# EAGLE board WS2801-Breakout-v11-panelized (EAGLE 5.11)
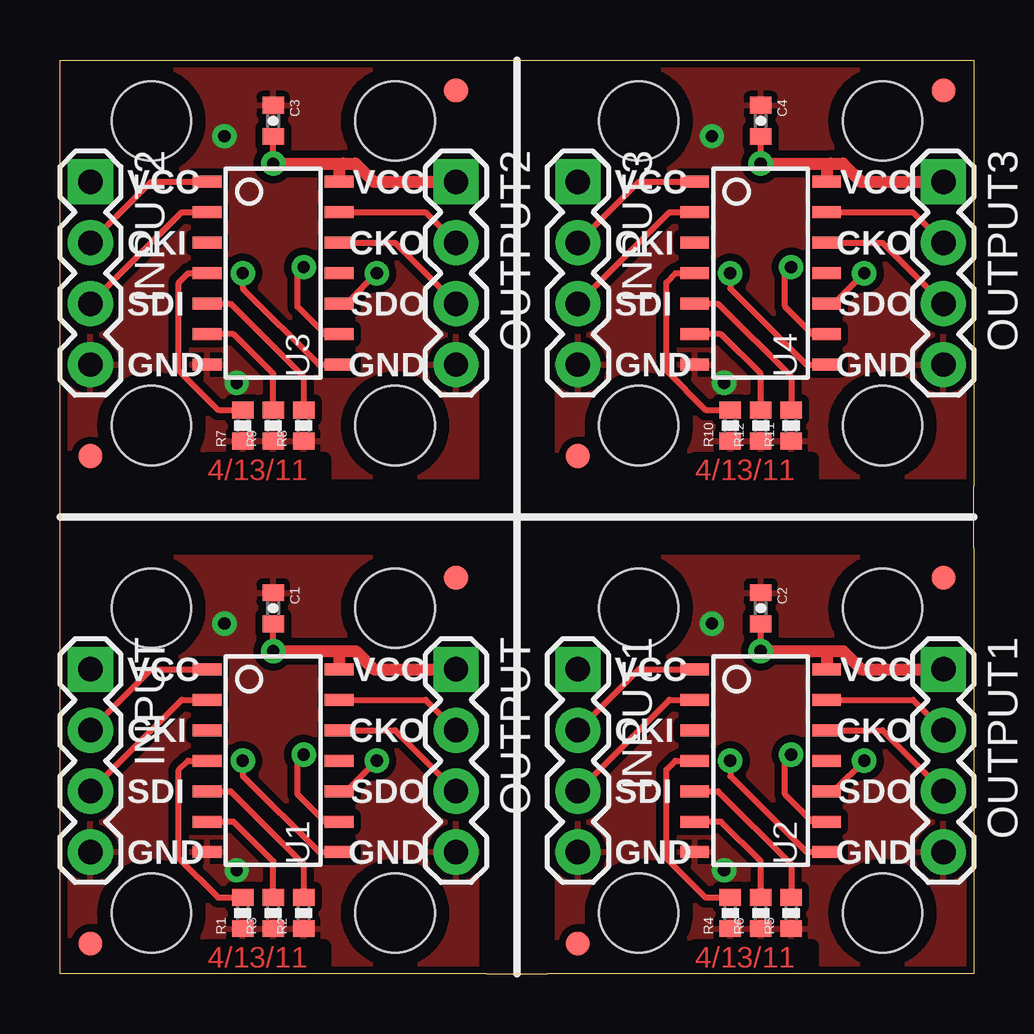
[diagram p0: board, top side]
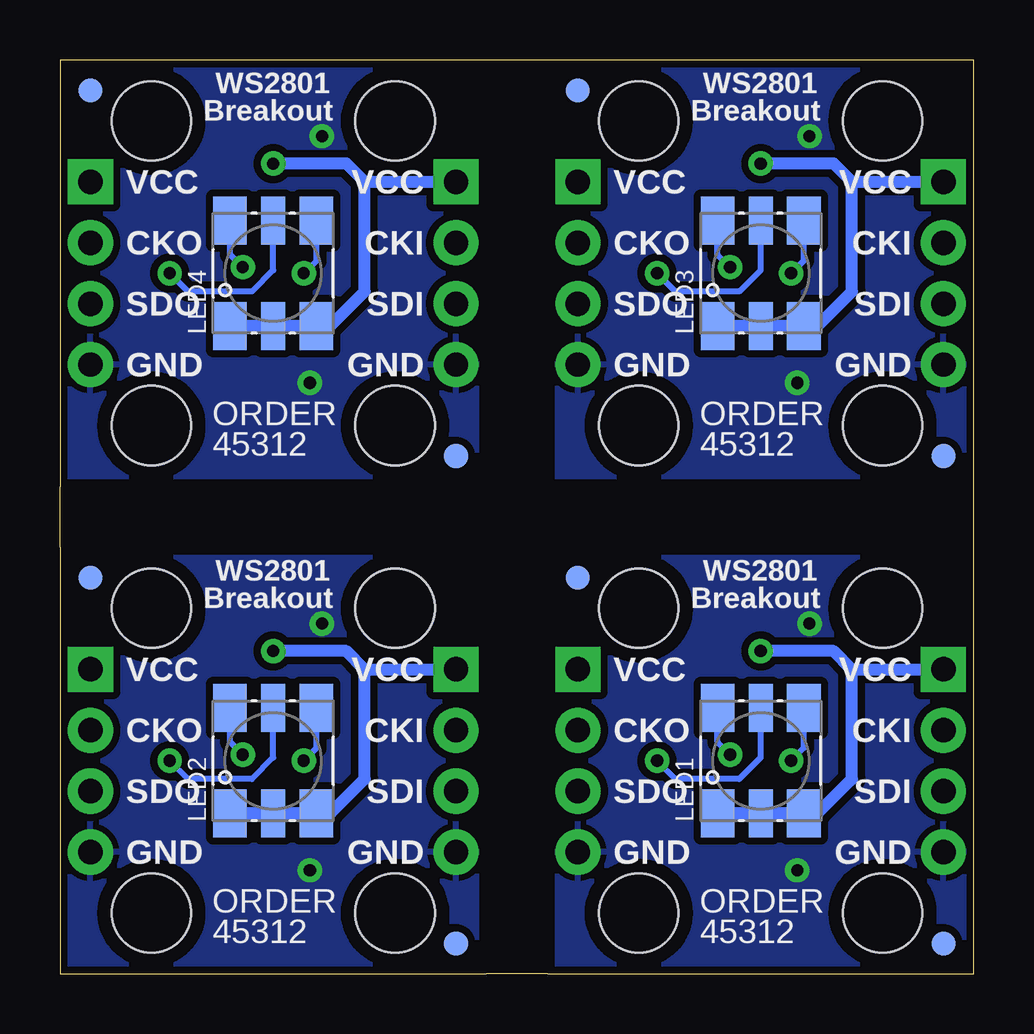
[diagram p1: board, bottom side, seen from below]

Size 38.1 x 38.1 mm. Coordinates in mm from the lower left corner, seen from the top.
Outline: 0,0 0,17.78 0,19.05 0,20.32 0,38.1 17.78,38.1 19.05,38.1 20.32,38.1 38.1,38.1 38.1,20.32 38.1,19.05 38.1,17.78 38.1,0 20.32,0 19.05,0 17.78,0 0,0
Copper layers (1*16): Top 0.035mm / dielectric 1.5mm / Bottom 0.035mm
Design rules "SparkFun *": minimum track width 8mil, minimum drill 20mil, track to track 8mil, track to pad 8mil, pad to pad 8mil, via to via 8mil, smd to smd 8mil, copper to edge 8mil, drill to drill 8mil, minimum pad ring 12mil, minimum via ring 10mil, stop-mask expansion 4mil, vias tented up to drill 20mil, thermal gap 10mil
tRestrict: 8 lines
bRestrict: 8 lines

## Footprints (pad centres in the part's own frame; a part is rotated, then mirrored left to right if it is on the bottom)
0402-CAP = smd 0.7 x 0.9: 1 -0.65,0; 2 0.65,0
1X04 = drill 1.016 pad 1.88 square: 1 0,0 | drill 1.016 pad 1.88 round: 2 2.54,0; 3 5.08,0; 4 7.62,0
STAND-OFF = hole 3.302: 0,0
FIDUCIAL-1X2 = smd 1 x 1: 1 0,0
LED-TRICOLOR-5050 = smd 2 x 1.4: 1 -2.2,1.8; 3 -2.2,-1.8; 4 2.2,-1.8; 6 2.2,1.8 | smd 2 x 1: 2 -2.2,0; 5 2.2,0
0402-RES = smd 0.7 x 0.9: 1 -0.65,0; 2 0.65,0
SOP-14 = smd 0.5 x 1.2: 1 -3.81,-2.75; 2 -2.54,-2.75; 3 -1.27,-2.75; 4 0,-2.75; 5 1.27,-2.75; 6 2.54,-2.75; 7 3.81,-2.75; 8 3.81,2.75; 9 2.54,2.75; 10 1.27,2.75; 11 0,2.75; 12 -1.27,2.75; 13 -2.54,2.75; 14 -3.81,2.75

## Placement (x,y rotation side)
C1  0.1uF  [0402-CAP]  8.89,15.24 270 top
C2  0.1uF  [0402-CAP]  29.21,15.24 270 top
C3  0.1uF  [0402-CAP]  8.89,35.56 270 top
C4  0.1uF  [0402-CAP]  29.21,35.56 270 top
INPUT  [1X04]  1.27,12.7 270 top
INPUT1  [1X04]  21.59,12.7 270 top
INPUT2  [1X04]  1.27,33.02 270 top
INPUT3  [1X04]  21.59,33.02 270 top
JP1  STAND-OFF  [STAND-OFF]  13.97,15.24 0 top
JP2  STAND-OFF  [STAND-OFF]  3.81,2.54 0 top
JP3  STAND-OFF  [STAND-OFF]  34.29,15.24 0 top
JP4  STAND-OFF  [STAND-OFF]  3.81,15.24 0 top
JP5  STAND-OFF  [STAND-OFF]  13.97,2.54 0 top
JP6  FIDUCIAL1X2  [FIDUCIAL-1X2]  16.51,16.51 0 top
JP7  FIDUCIAL1X2  [FIDUCIAL-1X2]  1.27,1.27 0 top
JP8  FIDUCIAL1X2  [FIDUCIAL-1X2]  1.27,1.27 0 bottom
JP9  FIDUCIAL1X2  [FIDUCIAL-1X2]  16.51,16.51 0 bottom
JP10  STAND-OFF  [STAND-OFF]  24.13,2.54 0 top
JP11  STAND-OFF  [STAND-OFF]  24.13,15.24 0 top
JP12  STAND-OFF  [STAND-OFF]  34.29,2.54 0 top
JP13  FIDUCIAL1X2  [FIDUCIAL-1X2]  36.83,16.51 0 top
JP14  FIDUCIAL1X2  [FIDUCIAL-1X2]  21.59,1.27 0 top
JP15  FIDUCIAL1X2  [FIDUCIAL-1X2]  21.59,1.27 0 bottom
JP16  FIDUCIAL1X2  [FIDUCIAL-1X2]  36.83,16.51 0 bottom
JP17  STAND-OFF  [STAND-OFF]  13.97,35.56 0 top
JP18  STAND-OFF  [STAND-OFF]  3.81,22.86 0 top
JP19  STAND-OFF  [STAND-OFF]  3.81,35.56 0 top
JP20  STAND-OFF  [STAND-OFF]  13.97,22.86 0 top
JP21  FIDUCIAL1X2  [FIDUCIAL-1X2]  16.51,36.83 0 top
JP22  FIDUCIAL1X2  [FIDUCIAL-1X2]  1.27,21.59 0 top
JP23  FIDUCIAL1X2  [FIDUCIAL-1X2]  1.27,21.59 0 bottom
JP24  FIDUCIAL1X2  [FIDUCIAL-1X2]  16.51,36.83 0 bottom
JP25  STAND-OFF  [STAND-OFF]  34.29,35.56 0 top
JP26  STAND-OFF  [STAND-OFF]  24.13,22.86 0 top
JP27  STAND-OFF  [STAND-OFF]  24.13,35.56 0 top
JP28  STAND-OFF  [STAND-OFF]  34.29,22.86 0 top
JP29  FIDUCIAL1X2  [FIDUCIAL-1X2]  36.83,36.83 0 top
JP30  FIDUCIAL1X2  [FIDUCIAL-1X2]  21.59,21.59 0 top
JP31  FIDUCIAL1X2  [FIDUCIAL-1X2]  21.59,21.59 0 bottom
JP32  FIDUCIAL1X2  [FIDUCIAL-1X2]  36.83,36.83 0 bottom
LED1  LED-TRICOLOR-5050  [LED-TRICOLOR-5050]  8.89,8.89 90 bottom
LED2  LED-TRICOLOR-5050  [LED-TRICOLOR-5050]  29.21,8.89 90 bottom
LED3  LED-TRICOLOR-5050  [LED-TRICOLOR-5050]  8.89,29.21 90 bottom
LED4  LED-TRICOLOR-5050  [LED-TRICOLOR-5050]  29.21,29.21 90 bottom
OUTPUT  [1X04]  16.51,12.7 270 top
OUTPUT1  [1X04]  36.83,12.7 270 top
OUTPUT2  [1X04]  16.51,33.02 270 top
OUTPUT3  [1X04]  36.83,33.02 270 top
R1  27  [0402-RES]  7.62,2.54 90 top
R2  27  [0402-RES]  10.16,2.54 90 top
R3  27  [0402-RES]  8.89,2.54 90 top
R4  27  [0402-RES]  27.94,2.54 90 top
R5  27  [0402-RES]  30.48,2.54 90 top
R6  27  [0402-RES]  29.21,2.54 90 top
R7  27  [0402-RES]  7.62,22.86 90 top
R8  27  [0402-RES]  10.16,22.86 90 top
R9  27  [0402-RES]  8.89,22.86 90 top
R10  27  [0402-RES]  27.94,22.86 90 top
R11  27  [0402-RES]  30.48,22.86 90 top
R12  27  [0402-RES]  29.21,22.86 90 top
U1  WS2801  [SOP-14]  8.89,8.89 270 top
U2  WS2801  [SOP-14]  29.21,8.89 270 top
U3  WS2801  [SOP-14]  8.89,29.21 270 top
U4  WS2801  [SOP-14]  29.21,29.21 270 top
U$1  CREATIVE_COMMONS  [CREATIVE_COMMONS]  -13.97,-8.89 0 top  (outside the outline)

## Library data of the parts
C1-C4 INPUT INPUT1-INPUT3 JP1-JP32 LED1-LED4 OUTPUT OUTPUT1-OUTPUT3 R1-R12 U1-U4 U$1 = SparkFun

## Nets
BFB: R3.2 U1.6
BFB1: R6.2 U2.6
BFB2: R9.2 U3.6
BFB3: R12.2 U4.6
BOUT: LED1.4 U1.8
BOUT1: LED2.4 U2.8
BOUT2: LED3.4 U3.8
BOUT3: LED4.4 U4.8
CKI: INPUT.2 U1.1
CKI1: INPUT1.2 U2.1
CKI2: INPUT2.2 U3.1
CKI3: INPUT3.2 U4.1
CKO: OUTPUT.2 U1.13
CKO1: OUTPUT1.2 U2.13
CKO2: OUTPUT2.2 U3.13
CKO3: OUTPUT3.2 U4.13
GFB: R2.2 U1.5
GFB1: R5.2 U2.5
GFB2: R8.2 U3.5
GFB3: R11.2 U4.5
GND: C1.1 INPUT.4 OUTPUT.4 R1.1 R2.1 R3.1 U1.7
GND1: C2.1 INPUT1.4 OUTPUT1.4 R4.1 R5.1 R6.1 U2.7
GND2: C3.1 INPUT2.4 OUTPUT2.4 R7.1 R8.1 R9.1 U3.7
GND3: C4.1 INPUT3.4 OUTPUT3.4 R10.1 R11.1 R12.1 U4.7
GOUT: LED1.6 U1.9
GOUT1: LED2.6 U2.9
GOUT2: LED3.6 U3.9
GOUT3: LED4.6 U4.9
RFB: R1.2 U1.4
RFB1: R4.2 U2.4
RFB2: R7.2 U3.4
RFB3: R10.2 U4.4
ROUT: LED1.5 U1.10
ROUT1: LED2.5 U2.10
ROUT2: LED3.5 U3.10
ROUT3: LED4.5 U4.10
SDI: INPUT.3 U1.2
SDI1: INPUT1.3 U2.2
SDI2: INPUT2.3 U3.2
SDI3: INPUT3.3 U4.2
SDO: OUTPUT.3 U1.12
SDO1: OUTPUT1.3 U2.12
SDO2: OUTPUT2.3 U3.12
SDO3: OUTPUT3.3 U4.12
VCC: C1.2 INPUT.1 LED1.1 LED1.2 LED1.3 OUTPUT.1 U1.14
VCC1: C2.2 INPUT1.1 LED2.1 LED2.2 LED2.3 OUTPUT1.1 U2.14
VCC2: C3.2 INPUT2.1 LED3.1 LED3.2 LED3.3 OUTPUT2.1 U3.14
VCC3: C4.2 INPUT3.1 LED4.1 LED4.2 LED4.3 OUTPUT3.1 U4.14

## Tracks (layer width: path | path; a pad name or v marks a point on that pad's centre or on a via)
BFB
  Top 0.254: R3.2 8.89,4.7 7.24,6.35 U1.6
BFB1
  Top 0.254: R6.2 29.21,4.7 27.56,6.35 U2.6
BFB2
  Top 0.254: R9.2 8.89,25.02 7.24,26.67 U3.6
BFB3
  Top 0.254: R12.2 29.21,25.02 27.56,26.67 U4.6
BOUT  (via drill 0.51)
  Top 0.254: U1.8 10.79,5.08 7.62,8.26 v7.62,8.89
  Bottom 0.254: LED1.4 7.09,9.42 v7.62,8.89
BOUT1  (via drill 0.51)
  Top 0.254: U2.8 31.11,5.08 27.94,8.26 v27.94,8.89
  Bottom 0.254: LED2.4 27.41,9.42 v27.94,8.89
BOUT2  (via drill 0.51)
  Top 0.254: U3.8 10.79,25.4 7.62,28.57 v7.62,29.21
  Bottom 0.254: LED3.4 7.09,29.74 v7.62,29.21
BOUT3  (via drill 0.51)
  Top 0.254: U4.8 31.11,25.4 27.94,28.57 v27.94,29.21
  Bottom 0.254: LED4.4 27.41,29.74 v27.94,29.21
CKI
  Top 0.254: U1.1 3.81,12.7 INPUT.2
CKI1
  Top 0.254: U2.1 24.13,12.7 INPUT1.2
CKI2
  Top 0.254: U3.1 3.81,33.02 INPUT2.2
CKI3
  Top 0.254: U4.1 24.13,33.02 INPUT3.2
CKO
  Top 0.254: U1.13 15.24,11.43 OUTPUT.2
CKO1
  Top 0.254: U2.13 35.56,11.43 OUTPUT1.2
CKO2
  Top 0.254: U3.13 15.24,31.75 OUTPUT2.2
CKO3
  Top 0.254: U4.13 35.56,31.75 OUTPUT3.2
GFB
  Top 0.254: U1.5 7.11,7.62 10.16,4.57 R2.2
GFB1
  Top 0.254: U2.5 27.43,7.62 30.48,4.57 R5.2
GFB2
  Top 0.254: U3.5 7.11,27.94 10.16,24.89 R8.2
GFB3
  Top 0.254: U4.5 27.43,27.94 30.48,24.89 R11.2
GND  (via drill 0.51)
  other vias: 6.86,14.61 7.37,4.32
  pour Top (isolate 0.305): 0,17.78 0,0 17.78,0 17.78,17.78
  pour Bottom (isolate 0.305): 0,17.78 0,0 17.78,0 17.78,17.78
GND1  (via drill 0.51)
  other vias: 27.18,14.61 27.69,4.32
  pour Top (isolate 0.305): 20.32,17.78 20.32,0 38.1,0 38.1,17.78
  pour Bottom (isolate 0.305): 20.32,17.78 20.32,0 38.1,0 38.1,17.78
GND2  (via drill 0.51)
  other vias: 6.86,34.92 7.37,24.64
  pour Top (isolate 0.305): 0,38.1 0,20.32 17.78,20.32 17.78,38.1
  pour Bottom (isolate 0.305): 0,38.1 0,20.32 17.78,20.32 17.78,38.1
GND3  (via drill 0.51)
  other vias: 27.18,34.92 27.69,24.64
  pour Top (isolate 0.305): 20.32,38.1 20.32,20.32 38.1,20.32 38.1,38.1
  pour Bottom (isolate 0.305): 20.32,38.1 20.32,20.32 38.1,20.32 38.1,38.1
GOUT  (via drill 0.51)
  Top 0.254: U1.9 11.05,6.35 9.91,7.49 9.91,8.89 v10.16,9.14
  Bottom 0.254: LED1.6 10.69,9.67 v10.16,9.14
GOUT1  (via drill 0.51)
  Top 0.254: U2.9 31.37,6.35 30.23,7.49 30.23,8.89 v30.48,9.14
  Bottom 0.254: LED2.6 31.01,9.67 v30.48,9.14
GOUT2  (via drill 0.51)
  Top 0.254: U3.9 11.05,26.67 9.91,27.81 9.91,29.21 v10.16,29.46
  Bottom 0.254: LED3.6 10.69,29.99 v10.16,29.46
GOUT3  (via drill 0.51)
  Top 0.254: U4.9 31.37,26.67 30.23,27.81 30.23,29.21 v30.48,29.46
  Bottom 0.254: LED4.6 31.01,29.99 v30.48,29.46
RFB
  Top 0.254: U1.4 5.33,8.89 4.95,8.51 4.95,4.83 6.59,3.19 R1.2
RFB1
  Top 0.254: U2.4 25.65,8.89 25.27,8.51 25.27,4.83 26.91,3.19 R4.2
RFB2
  Top 0.254: U3.4 5.33,29.21 4.95,28.83 4.95,25.15 6.59,23.51 R7.2
RFB3
  Top 0.254: U4.4 25.65,29.21 25.27,28.83 25.27,25.15 26.91,23.51 R10.2
ROUT  (via drill 0.51)
  Top 0.254: U1.10 11.64,7.66 11.98,7.66 v13.21,8.89
  Bottom 0.254: LED1.5 8.89,9.02 9.78,8.13 12.45,8.13 v13.21,8.89
ROUT1  (via drill 0.51)
  Top 0.254: U2.10 31.96,7.66 32.3,7.66 v33.53,8.89
  Bottom 0.254: LED2.5 29.21,9.02 30.1,8.13 32.77,8.13 v33.53,8.89
ROUT2  (via drill 0.51)
  Top 0.254: U3.10 11.64,27.98 11.98,27.98 v13.21,29.21
  Bottom 0.254: LED3.5 8.89,29.34 9.78,28.45 12.45,28.45 v13.21,29.21
ROUT3  (via drill 0.51)
  Top 0.254: U4.10 31.96,27.98 32.3,27.98 v33.53,29.21
  Bottom 0.254: LED4.5 29.21,29.34 30.1,28.45 32.77,28.45 v33.53,29.21
SDI
  Top 0.254: U1.2 5.08,11.43 INPUT.3
SDI1
  Top 0.254: U2.2 25.4,11.43 INPUT1.3
SDI2
  Top 0.254: U3.2 5.08,31.75 INPUT2.3
SDI3
  Top 0.254: U4.2 25.4,31.75 INPUT3.3
SDO
  Top 0.254: U1.12 13.97,10.16 OUTPUT.3
SDO1
  Top 0.254: U2.12 34.29,10.16 OUTPUT1.3
SDO2
  Top 0.254: U3.12 13.97,30.48 OUTPUT2.3
SDO3
  Top 0.254: U4.12 34.29,30.48 OUTPUT3.3
VCC  (via drill 0.51)
  Top 0.254: v8.89,13.46 C1.2
  Top 0.508: 11.81,13.46 12.32,13.46 13.08,12.7 OUTPUT.1 | U1.14 11.64,13.29 11.81,13.46 | v8.89,13.46 11.81,13.46
  Bottom 0.508: v8.89,13.46 5.84,13.46 5.08,12.7 | 5.08,12.7 INPUT.1 | 5.08,12.7 5.08,8.13 6.52,6.69 LED1.3 LED1.2 | LED1.2 LED1.1 LED1.2
VCC1  (via drill 0.51)
  Top 0.254: v29.21,13.46 C2.2
  Top 0.508: 32.13,13.46 32.64,13.46 33.4,12.7 OUTPUT1.1 | U2.14 31.96,13.29 32.13,13.46 | v29.21,13.46 32.13,13.46
  Bottom 0.508: v29.21,13.46 26.16,13.46 25.4,12.7 | 25.4,12.7 INPUT1.1 | 25.4,12.7 25.4,8.13 26.84,6.69 LED2.3 LED2.2 | LED2.2 LED2.1 LED2.2
VCC2  (via drill 0.51)
  Top 0.254: v8.89,33.78 C3.2
  Top 0.508: 11.81,33.78 12.32,33.78 13.08,33.02 OUTPUT2.1 | U3.14 11.64,33.61 11.81,33.78 | v8.89,33.78 11.81,33.78
  Bottom 0.508: v8.89,33.78 5.84,33.78 5.08,33.02 | 5.08,33.02 INPUT2.1 | 5.08,33.02 5.08,28.45 6.52,27.01 LED3.3 LED3.2 | LED3.2 LED3.1 LED3.2
VCC3  (via drill 0.51)
  Top 0.254: v29.21,33.78 C4.2
  Top 0.508: 32.13,33.78 32.64,33.78 33.4,33.02 OUTPUT3.1 | U4.14 31.96,33.61 32.13,33.78 | v29.21,33.78 32.13,33.78
  Bottom 0.508: v29.21,33.78 26.16,33.78 25.4,33.02 | 25.4,33.02 INPUT3.1 | 25.4,33.02 25.4,28.45 26.84,27.01 LED4.3 LED4.2 | LED4.2 LED4.1 LED4.2

## Text on the board
Top: 4/13/11 | 4/13/11 | 4/13/11 | 4/13/11
tPlace: VCC | VCC | VCC | VCC | CKO | CKO | CKI | CKI | SDO | SDO | SDI | SDI | GND | GND | GND | GND | VCC | VCC | VCC | VCC | CKO | CKO | CKI | CKI | SDO | SDO | SDI | SDI | GND | GND | GND | GND
bPlace: WS2801 | WS2801 | Breakout | Breakout | VCC | VCC | VCC | VCC | CKI | CKI | CKO | CKO | SDI | SDI | SDO | SDO | GND | GND | GND | GND | ORDER | ORDER | 45312 | 45312 | WS2801 | WS2801 | Breakout | Breakout | VCC | VCC | VCC | VCC | CKI | CKI | CKO | CKO | SDI | SDI | SDO | SDO | GND | GND | GND | GND | ORDER | ORDER | 45312 | 45312